# Altium PCB PCB1.PcbDoc
Units mm, origin at the board's own origin, x right, y up, seen from the top; angles counter-clockwise.
Board outline 80 x 100 mm, 2 copper layers (Top Layer, Bottom Layer); 93 components, 53 nets, 282 pads, 664 vias.
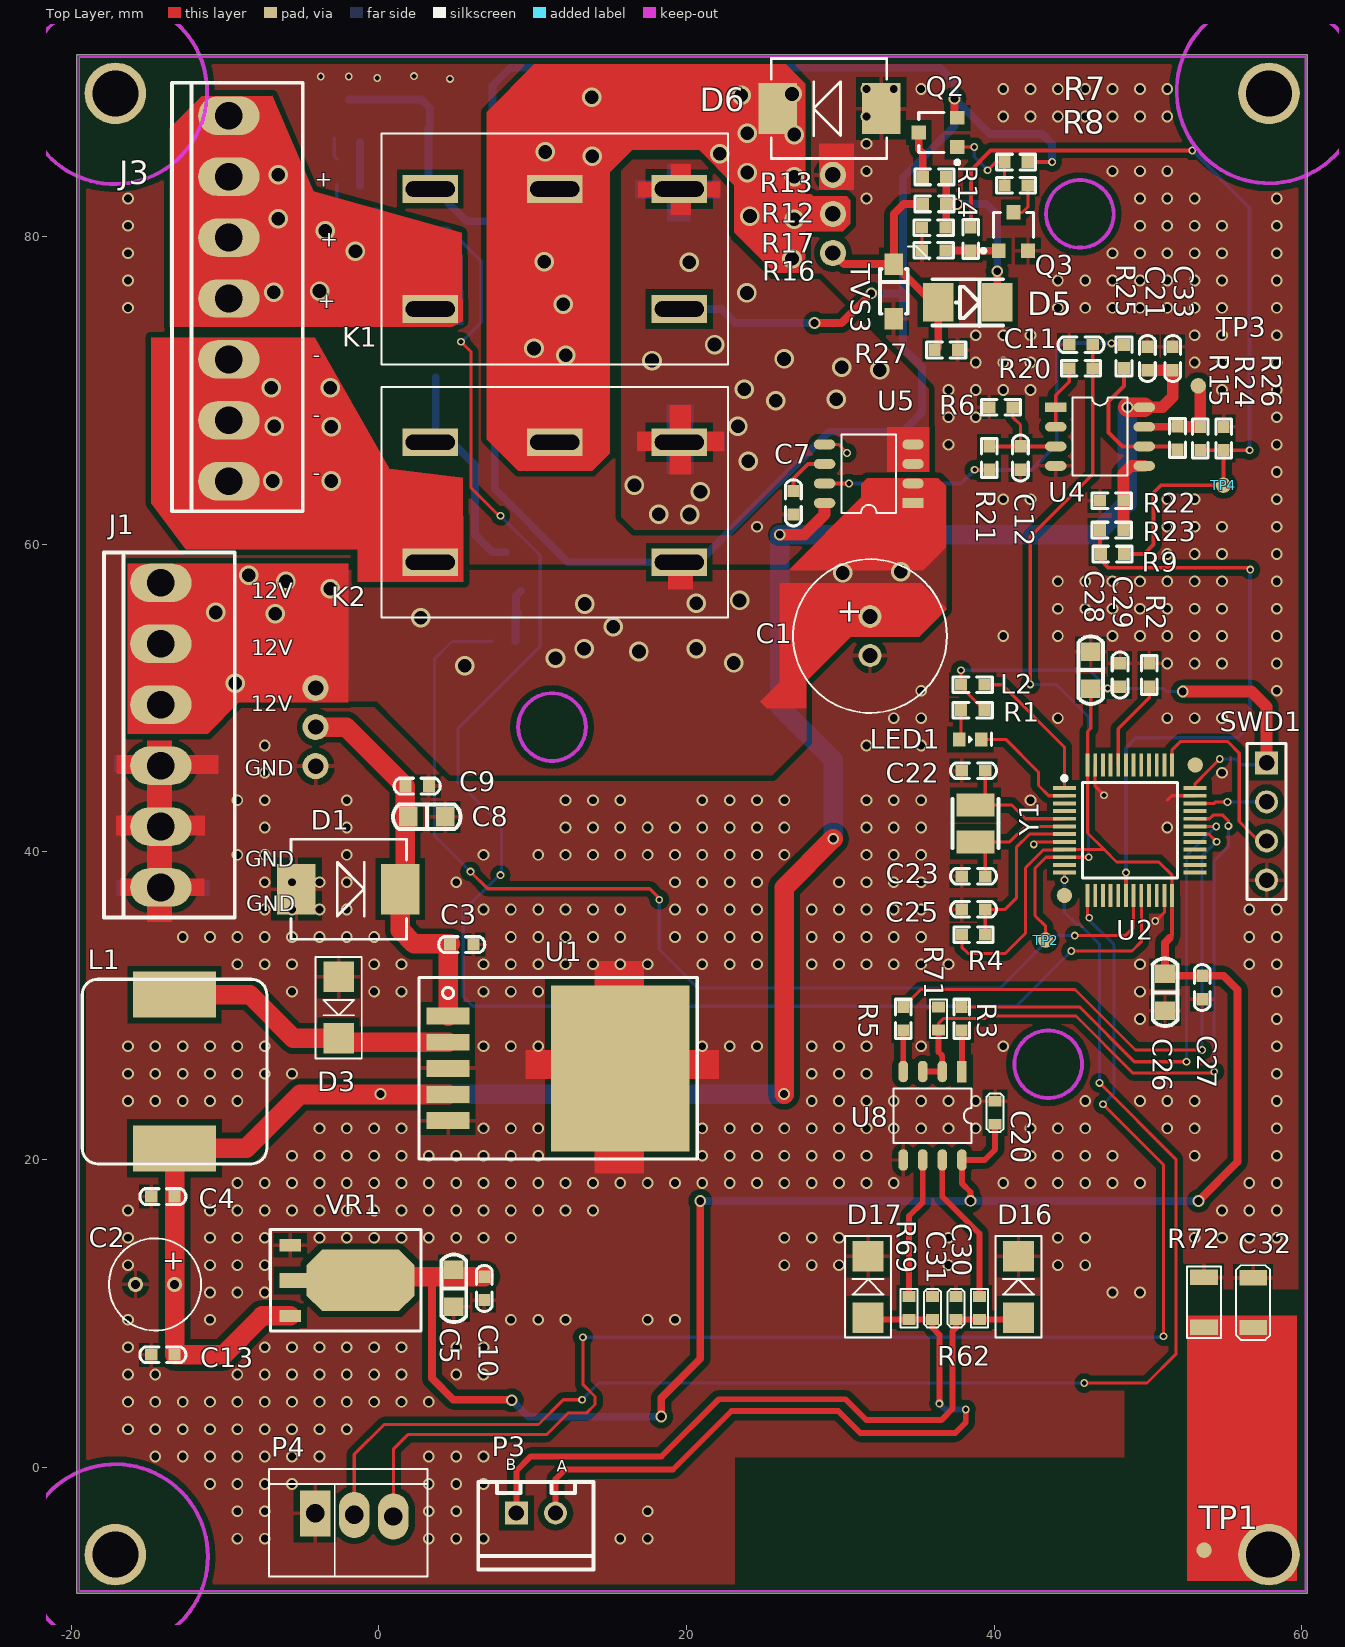
[diagram p0: Top Layer view]
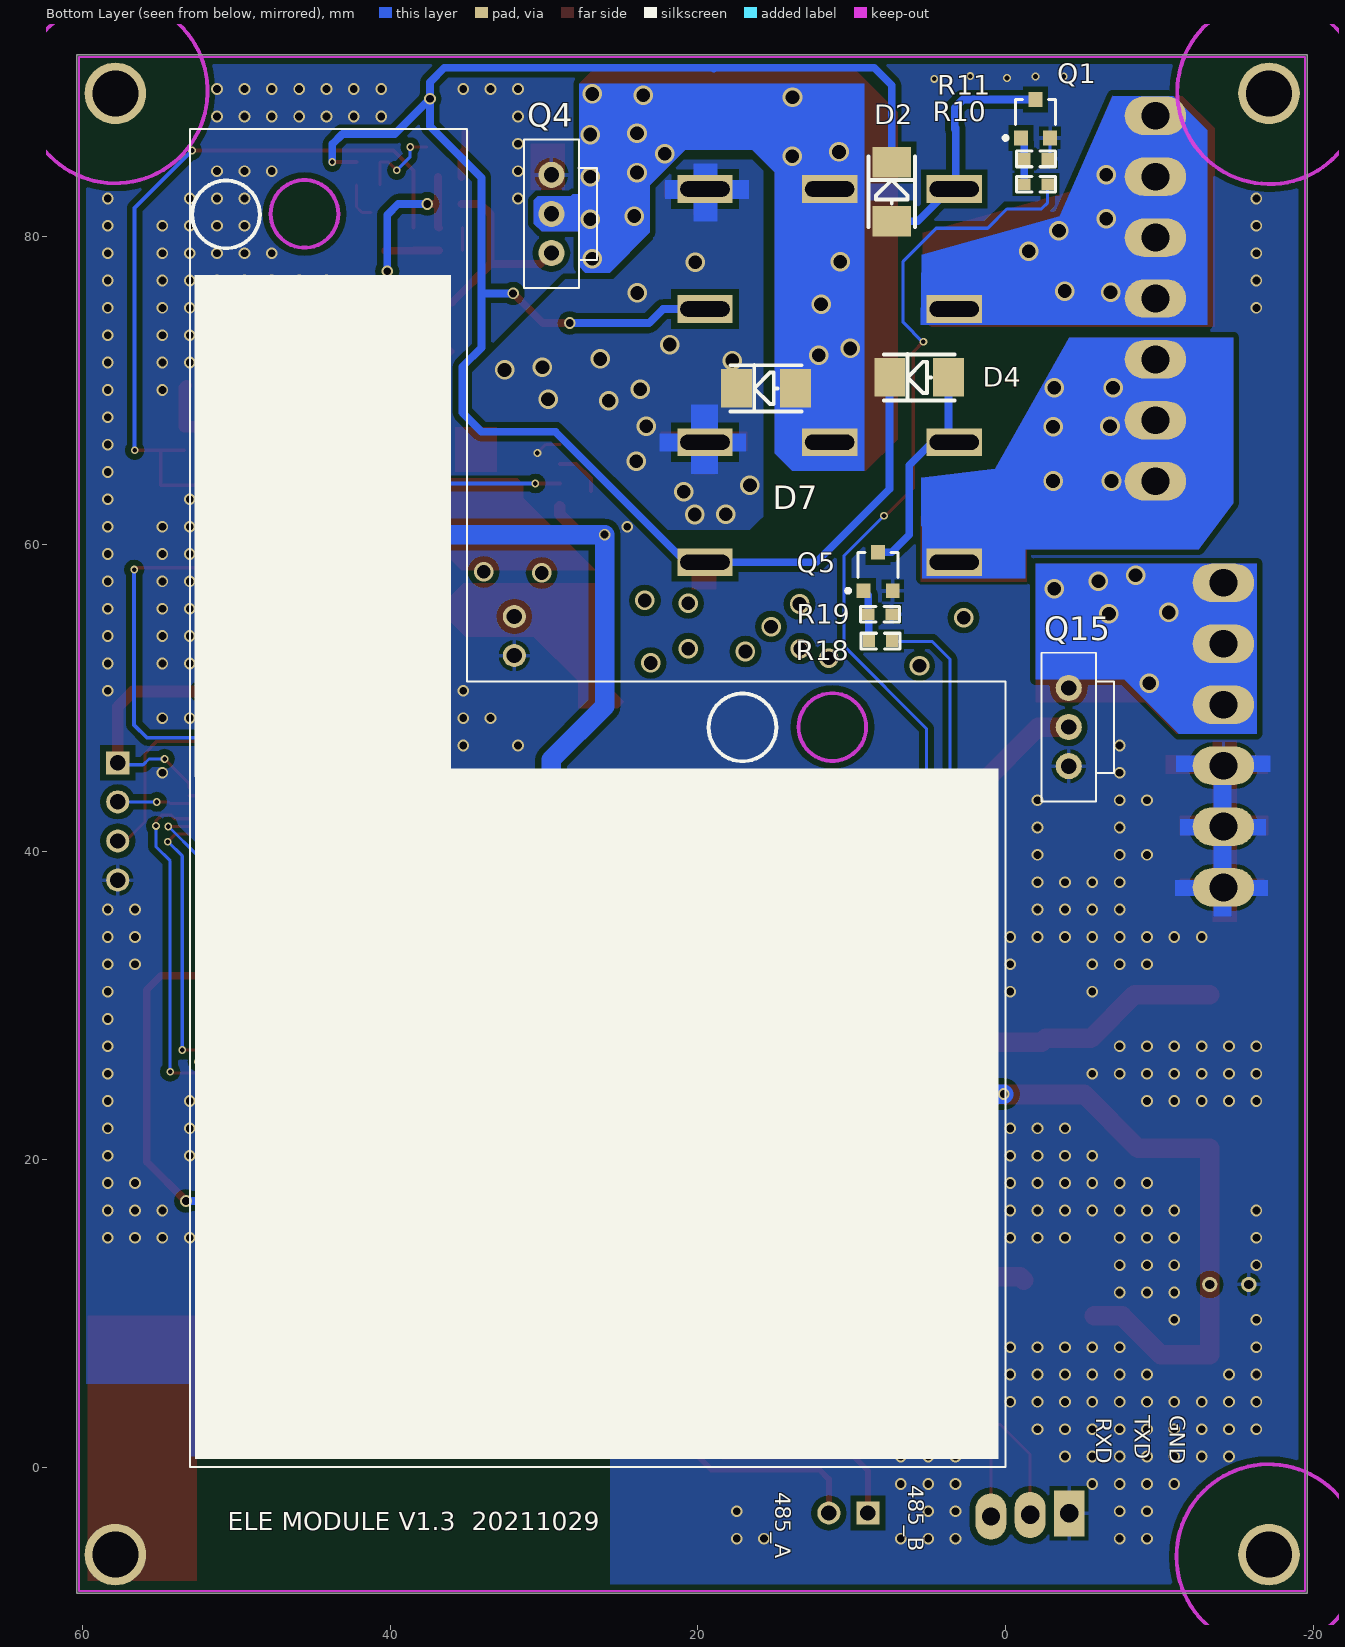
[diagram p1: Bottom Layer view, seen from below]
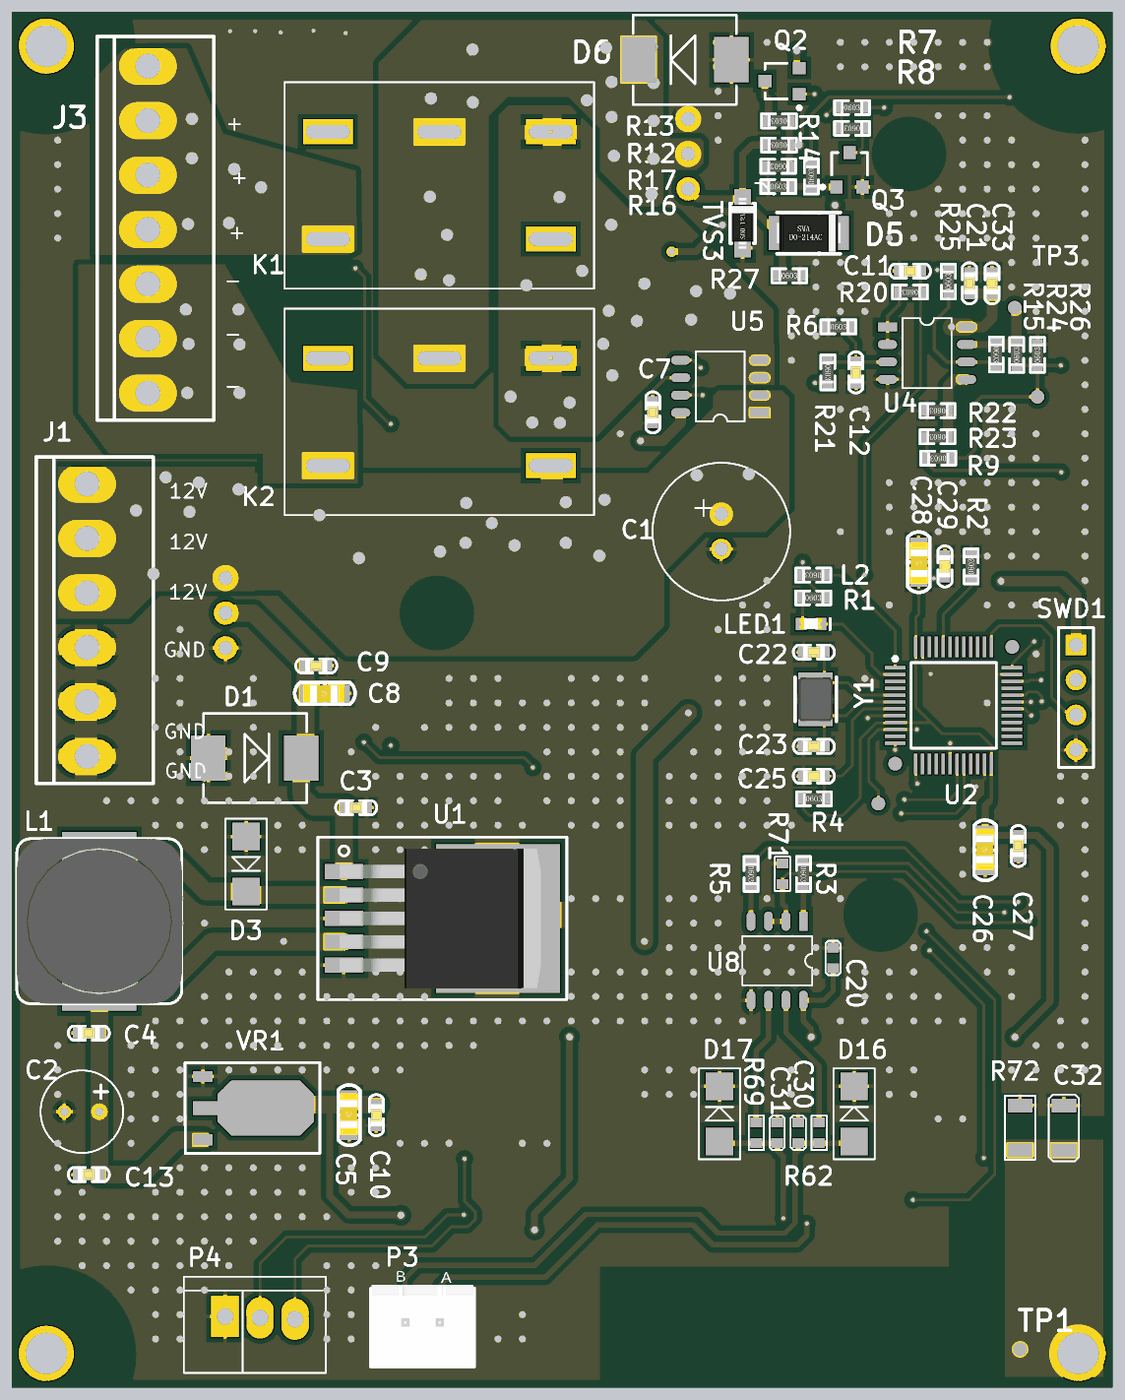
[diagram p2: 3D render of the assembled board from above, using the file's embedded part models]
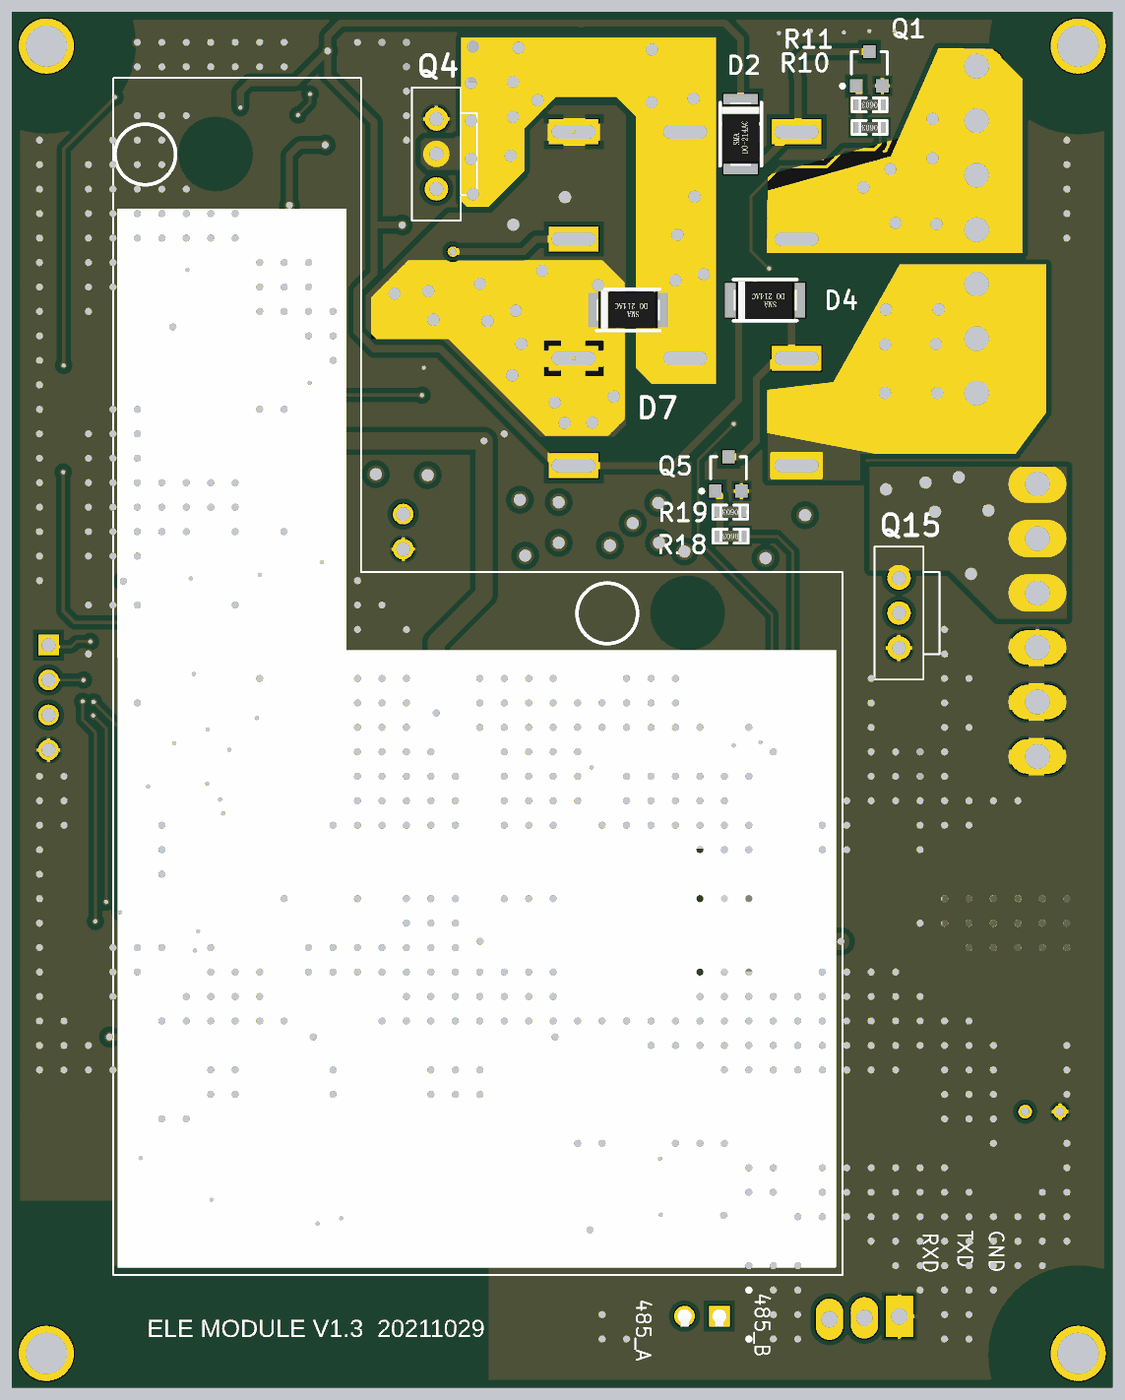
[diagram p3: 3D render of the assembled board from below, using the file's embedded part models]

## Layer stack, top to bottom
Top Layer: signal copper 0.0356
Dielectric: dielectric 0.32, FR-4, Dk 4.8
Bottom Layer: signal copper 0.0356

## Board outline
-19.634,-8.195 -19.634,91.805 60.366,91.805 60.366,-8.195

## Design rules (kind name [scope] priority, off if disabled: settings)
Clearance gnd [All] p1: gap=0.381
Clearance [All] p2: gap=0.254
DiffPairsRouting [All] p1: maxlimit=0.254 minlimit=0.254 mostfreqgap=0.254 maxuncoupledlength=12.7
MinimumSolderMaskSliver [All] p1: minsoldermaskwidth=0.025
PolygonConnect PolygonConnect_1 [isvia] p1: connectstyle=Direct reliefconductorwidth=0.254 reliefentries=4 polygonreliefangle="90 Angle"
PolygonConnect [All] p2: connectstyle=Relief reliefconductorwidth=0.254 reliefentries=4 polygonreliefangle="90 Angle"
RoutingVias [All] p1: holewidth=0.711 width=1.27 viastyle="Through Hole" minholewidth=0.711 minwidth=1.27 maxholewidth=0.711 maxwidth=1.27
SilkscreenOverComponentPads SilkToSolderMaskClearance [IsPad] p1: minsilkscreentomaskgap=0.025
SolderMaskExpansion [All] p1: expansion=0.102
Width [All] p1: maxlimit=12.7 minlimit=0.127 preferedwidth=0.254
25 further rules are at their usual default settings.

## Classes and differential pairs
component class 02_Power: C1 C2 C3 C4 C5 C8 C9 C10 C13 D1 D3 J1 L1 Q15 U1 VR1
component class 03_MCU: C22 C23 C25 C26 C27 C28 C29 L2 LED1 R1 R2 R3 R4 R5 SWD1 U2 Y1
component class 07_EL_CON: C7 C11 C12 C21 C33 C? D2 D4 D5 D6 D7 J3 K1 K2 Q1 Q2 Q3 Q4 Q5 R6 R7 R8 R9 R10 R11 R12 R13 R14 R15 R16 R17 R18 R19 R20 R21 R22 R23 R24 R25 R26 R27 R? TP2 TP3 TP4 TVS3 U4 U5 U?
component class com: C20 C30 C31 C32 D16 D17 P3 P4 R62 R69 R71 R72 TP1 U8
differential pair 485: +485_P -485_N

## Components (designator, comment, footprint, x,y, rotation, side; value= is the part's Value field where it differs from the comment)
C1 "1000uF/35V" 10*16 31.928,54.026 r90 top
C2 "100uF/35V" 6*8 -14.554,11.871 r0 top
C3 "104 50V" SMD-0603C 5.385,33.969 r180 top
C4 "104 50V" SMD-0603C -14.046,17.586 r0 top
C5 "10uF 25V" SMD-0805C 4.877,11.617 r90 top
C7 "104 50V" SMD-0603C 26.949,62.687 r270 top
C8 "10uF50V" SMD-0805C 3.115,42.269 r180 top
C9 "104 50V" SMD-0603C 2.489,44.272 r180 top
C10 "104 50V" SMD-0603C 6.85,11.617 r90 top
C11 "NC" SMD-0603C 45.644,72.958 r0 top
C12 "104 50V" SMD-0603C 41.707,65.592 r270 top
C13 "104 50V" SMD-0603C -14.046,7.299 r0 top
C20 "104 50V" 0603C 40.056,22.285 r90 top
C21 "104 50V" SMD-0603C 49.962,72.069 r270 top
C22 "12P 50V" SMD-0603C 38.659,45.272 r180 top
C23 "12P 50V" SMD-0603C 38.659,38.414 r180 top
C25 "104 50V" SMD-0603C 38.659,36.255 r0 top
C26 "10uF 25V" SMD-0805C 51.105,30.864 r90 top
C27 "104 50V" SMD-0603C 53.518,31.175 r90 top
C28 "10uF 25V" SMD-0805C 46.279,51.806 r270 top
C29 "104 50V" SMD-0603C 48.184,51.495 r270 top
C30 "220PF/16V" 0603C 37.516,9.585 r90 top
C31 "220PF/16V" 0603C 35.992,9.585 r90 top
C32 "1NF/2KV" 1206C 56.834,12.319 r270 top
C33 "104 50V" SMD-0603C 51.613,72.069 r270 top
D1 "SMCJ24CA" SMC -5.359,37.567 r0 top
D2 "1N4007" DO-214-AC 7.391,82.906 r90 bottom
D3 "SS34" SMA -2.616,31.873 r270 top
D4 "1N4007" DO-214-AC 5.613,70.841 r0 bottom
D5 "1N4007" DO-214-AC 38.278,75.717 r0 top
D6 "SMC27CA" SMC 32.664,88.316 r180 top
D7 "1N4007" DO-214-AC 15.57,70.129 r0 bottom
D16 "SMAJ6.5CA" SMA 41.58,9.712 r90 top
D17 "SMAJ6.5CA" SMA 31.801,9.712 r90 top
J1 "HEADER_6" VH-AW-3.96*6P -14.173,43.621 r90 top
J3 "Header 7" VH-AW-3.96*7P -9.754,70.028 r90 top
K1 "301-1C-C-D1-24VDC" 301-1C-C-R1-24VDC 19.533,83.083 r180 top
K2 "301-1C-C-D1-24VDC" 301-1C-C-R1-24VDC 19.533,66.624 r180 top
L1 "33uH/5a" CDRH-127 -13.284,25.714 r270 top
L2 "MPZ1608D101BTA00" SMD-0603 38.605,50.86 r180 top
LED1 "LED G" SMD-0603D 38.437,47.316 r0 top
P3 "XH2.54 2P" SIP-2A 10.211,-2.988 r0 top
P4 "1*3P" 3X2.54MMZ2 -4.14,-3.015 r0 top
Q1 "LH8050QLT1G" SOT-23 -1.956,87.655 r180 bottom
Q2 "BC807-16" SOT-23 36.347,86.766 r90 top
Q3 "BC817-16" SOT-23 41.25,80.315 r0 top
Q4 "AOT2502L/AOT2610L" to220 29.515,78.927 r90 bottom
Q5 "LH8050QLT1G" SOT-23 8.28,58.217 r180 bottom
Q15 "AOTF4185" to220 -4.115,45.568 r90 bottom
R1 "1K" SMD-0603 38.605,49.209 r0 top
R2 "100K" SMD-0603 50.089,51.495 r90 top
R3 "1K" SMD-0603 37.897,29.143 r270 top
R4 "100K" SMD-0603 38.659,34.604 r0 top
R5 "1K" SMD-0603 34.087,29.143 r270 top
R6 "10K" SMD-0603 40.437,68.904 r0 top
R7 "47K" SMD-0603 41.427,84.836 r0 top
R8 "2K" SMD-0603 41.427,83.337 r180 top
R9 "0" SMD-0603 47.696,59.356 r180 top
R10 "2K" SMD-0603 -1.981,83.388 r0 bottom
R11 "5.1K" SMD-0603 -1.981,85.039 r0 bottom
R12 "100" SMD-0603 36.119,82.118 r180 top
R13 "7.8K" SMD-0603 36.119,83.871 r180 top
R14 "1K" SMD-0603 38.481,79.832 r90 top
R15 "510K" SMD-0603 51.918,66.904 r270 top
R16 "10K" SMD-0603 36.068,79.096 r0 top
R17 "4.7K" SMD-0603 36.068,80.569 r180 top
R18 "2K" SMD-0603 8.128,53.696 r0 bottom
R19 "5.1K" SMD-0603 8.153,55.448 r0 bottom
R20 "100R" SMD-0603 45.644,71.434 r180 top
R21 "10K" SMD-0603 39.675,65.592 r270 top
R22 "510K" SMD-0603 47.638,62.818 r180 top
R23 "10K" SMD-0603 47.638,60.913 r180 top
R24 "20K/NC" SMD-0603 53.391,66.862 r90 top
R25 "10K" SMD-0603 48.438,72.196 r90 top
R26 "30K/NC" SMD-0603 54.915,66.862 r90 top
R27 "10K" SMD-0603 36.881,72.619 r0 top
R62 "8.2R 5%" 0603R 39.04,11.085 r270 top
R69 "8.2R 5%" 0603R 34.468,11.085 r270 top
R71 "10K" 0603R 36.373,28.405 r90 top
R72 "10M 5%" 1206r 53.645,12.327 r270 top
SWD1 "SIP-4 (NC)" SIP-4 57.709,41.97 r270 top
TP1 "TPS" tpd 53.645,-5.401 r90 top
TP2 "TPS" tpd 43.344,34.259 r0 top
TP3 "TPS" tpd 53.264,70.291 r0 top
TP4 "TPS" tpd 54.904,63.825 r0 top
TVS3 "BZT52C10-G" SOD-123 33.477,76.429 r90 top
U1 "LM2596S 5.0V" TO-263-5 4.496,25.919 r270 top
U2 "GD32F103C8T6" LQFP48 44.565,44.144 r0 top
U4 "OPA2376AIDR" SO-8 44.003,68.894 r0 top
U5 "ACS712ELCTR-20A-T" SO-8 34.722,62.671 r180 top
U8 "TP8485E-SR" SO-8 37.897,25.714 r270 top
VR1 "LM1117 3.3V" SOT223 -5.764,14.425 r270 top
Y1 "8MHz" XTAL-3225-2 38.786,41.843 r270 top

## Footprints (in the part's own frame and the unit in brackets; to place one, negate y for a bottom-side part, rotate by r counter-clockwise, add the part's x,y. Pads: shape width x height; smd on the part's side, far side on the other; paste and mask are expansions set on the pad)
3X2.54MMZ2 [mm]
  rect 2x3 hole 1.2: 1(0,0)
  oval 2x3 hole 1.2: 2(2.54,-0.1) 3(5.08,-0.2)
  silkscreen extent -3,-4.1 7.31,2.9
6*8 [mm]
  round 1 hole 0.6: 1(1.27,0) 2(-1.27,0)
  silkscreen extent -3,-3 3,3
10*16 [mm]
  round 1.5 hole 1: 1(1.27,0) 2(-1.27,0)
  silkscreen extent -5,-5 5,5
301-1C-C-R1-24VDC [mm]
  rect 3.6x1.8 hole 1 slot 3.2 at 0 deg: 30(16.2,7.8) 85(16.2,0) 86(0,7.8) 87(8.1,0) 88(0,0)
  silkscreen extent -3.15,-3.6 19.35,11.4
0603C [mm]
  rect 0.7x0.85 smd: 1(0,0) 2(1.5,0)
  silkscreen extent -0.5,-0.55 2,0.55
0603R [mm]
  rect 0.7x0.85 smd: 1(0,0) 2(1.5,0)
  silkscreen extent -0.5,-0.55 2,0.55
1206C [mm]
  rect 1x1.8 smd: 1(0,0) 2(3.25,0)
  silkscreen extent -0.8,-1.1 4.05,1.1
1206r [mm]
  rect 1x1.8 smd: 1(0,0) 2(3.25,0)
  silkscreen extent -0.7,-1.1 3.95,1.1
CDRH-127 [mm]
  rect 3x5.4 smd: 1(-5,0) 2(5,0)
  silkscreen extent -6,-6 6,6, body extent -6,-6 6,6, height 8.2
DO-214-AC [mm]
  rect 2x2.5 smd: 1(-1.915,0) 2(1.915,0)
  silkscreen extent -2.3,-1.52 2.3,1.5, body extent -2.3,-1.35 2.3,1.35, height 2.4
LQFP48 [mm]
  round 1 smd: 0(0,-6.985) 0(8.509,1.5)
  rect 1.5x0.25 smd: 1(0,0) 2(0,-0.5) 3(0,-1) 4(0,-1.5) 5(0,-2) 6(0,-2.5) 7(0,-3) 8(0,-3.5) 9(0,-4) 10(0,-4.5) 11(0,-5) 12(0,-5.5) 25(8.495,-5.5) 26(8.495,-5) 27(8.495,-4.5) 28(8.495,-4) 29(8.495,-3.5) 30(8.495,-3) 31(8.495,-2.5) 32(8.495,-2) 33(8.495,-1.5) 34(8.495,-1) 35(8.495,-0.5) 36(8.495,0)
  rect 0.25x1.5 smd: 13(1.5,-7) 14(2,-7) 15(2.5,-7) 16(3,-7) 17(3.5,-7) 18(4,-7) 19(4.5,-7) 20(5,-7) 21(5.5,-7) 22(6,-7) 23(6.5,-7) 24(7,-7) 37(7,1.5) 38(6.5,1.5) 39(6,1.5) 40(5.5,1.5) 41(5,1.5) 42(4.5,1.5) 43(4,1.5) 44(3.5,1.5) 45(3,1.5) 46(2.5,1.5) 47(2,1.5) 48(1.5,1.5)
  silkscreen extent -0.13,-5.86 7.35,0.76
SIP-2A [mm]
  rect 1.5x1.5 hole 1: 1(-1.27,0)
  round 1.5 hole 1: 2(1.27,0)
  silkscreen extent -3.75,-3.68 3.75,2.02, body extent -3.7,-3.81 3.7,2.29, height 7.5
SIP-4 [mm]
  rect 1.5x1.5 hole 1: 1(-3.81,0)
  round 1.5 hole 1: 2(-1.27,0) 3(1.27,0) 4(3.81,0)
  silkscreen extent -5.08,-1.27 5.08,1.27
SMA [mm]
  rect 2x2 smd: 1(0,0) 2(4,0)
  silkscreen extent -1.3,-1.5 5.3,1.5
SMC [mm]
  rect 2.5x3.3 smd: 1(0,0) 2(6.75,0)
  silkscreen extent -0.35,-3.25 7.15,3.25
SMD-0603 [mil]
  rect 31.5x30 smd: 1(-30,0) 2(30,0)
  silkscreen extent -50,-20 50,20, body extent -31,-16 31,16, height 18
SMD-0603C [mil]
  rect 31.5x30 smd: 1(-30,0) 2(30,0)
  silkscreen extent -59,-20 59,20, body extent -32,-16 32,16, height 31
SMD-0603D [mm]
  rect 0.8x0.9 smd: 1(-0.7,-0.012) 2(0.73,-0.012)
  silkscreen extent -0.08,-0.41 1.4,0.39, body extent -0.8,-0.39 0.8,0.41, height 0.6
SMD-0805C [mm]
  rect 1.2x1.27 smd: 1(-1.2,0) 2(1.2,0)
  silkscreen extent -2.2,-0.8 2.2,0.8, body extent -1.42,-0.67 1.58,0.73, height 0.93
SO-8 [mil]
  rect 55x25 smd: 1(0,0)
  oval 55x25 smd: 2(0,-50) 3(0,-100) 4(0,-150) 5(226.38,-150) 6(226.38,-100) 7(226.38,-50) 8(226.38,0)
  silkscreen extent 43,-175 183,25
SOD-123 [mm]
  rect 1.4x1.2 smd: 1(-1.778,0) 2(1.778,0)
  silkscreen extent -1.45,-0.9 1.45,0.9, body extent -1.85,-0.8 1.85,0.8, height 1.2
SOT223 [mm]
  rect 0.8x1.4 smd: 1(0,0) 3(4.6,0)
  rect 1x1.854 smd: 2(2.3,0.227)
  oct 4x7 smd: 4(2.286,4.572)
  silkscreen extent -1.02,-1.3 5.59,8.51
SOT-23 [mm] "SOT-23; 3 Leads; Body 3.0 x 2.6 mm, inc. leads (LxW max)"
  rect 0.9x0.95 smd: 1(-0.95,-1.25) 2(0.95,-1.25) 3(0,1.25)
  silkscreen extent -2.08,-1.37 1.3,1.25
to220 [mm]
  round 1.7 hole 1: 1(0,0) 2(2.54,0) 3(5.08,0)
  silkscreen extent -2.29,-2.95 7.37,1.78
TO-263-5 [mm]
  rect 1.1x2.8 smd: 1(-3.4,0) 2(-1.7,0) 3(0,0) 4(1.7,0) 5(3.4,0)
  rect 10.8x9 smd: 6(0,11.2)
  silkscreen extent -5.9,-1.9 5.9,16.2, body extent -5.08,-0.32 5.08,14.32, height 4.57
tpd [mm]
  round 1 smd: 1(0,0)
VH-AW-3.96*6P [mm]
  oval 2.5x4 hole 1.8: 1(-5.94,0) 2(-1.98,0) 3(1.98,0) 4(5.94,0) 5(9.9,0) 6(13.86,0)
  silkscreen extent -7.89,-4.8 15.82,3.7
VH-AW-3.96*7P [mm]
  oval 2.5x4 hole 1.8: 1(-5.94,0) 2(-1.98,0) 3(1.98,0) 4(5.94,0) 5(9.9,0) 6(13.86,0) 7(17.82,0)
  silkscreen extent -7.89,-4.8 19.96,3.7
XTAL-3225-2 [mm]
  rect 1.5x2.5 smd: 1(-1.2,0) 2(1.2,0)
  silkscreen extent -1.6,-1.5 1.6,1.5, body extent -1.6,-1.25 1.6,1.25, height 0.9

## Part data
C1 C2: library part CAP2, "电解电容"
C3 C4 C8 C9 C10 C11 C12 C13: library part CAP4, "贴片电容 10%"
C5 C21 C25 C26 C27 C28 C29 C33: library part CAP4, "贴片电容 20%"
C7: library part C, "贴片电容 10%"
C20 C30 C31 C32: library part CAP
C22 C23: library part CAP4, "贴片电容 5%"
D1 D3 D6: library part DIODE
D2 D4 D5 D7: library part DIODE2, "贴片二极管"
D16 D17: library part D_ESD
J3: "Header, 7-Pin"
K1 K2: library part JDQ1, "5V 继电器"
L1: library part IND
L2: library part CIZHU1, "磁珠电感 100R 100MHz"
LED1: library part LED, "绿色普亮"
P3: library part SIP-2, "XH2.54 2P 直插"
P4: library part HDR1*3
Q1 Q3 Q5: library part NPN-1, "三极管"
Q2: library part PNP, "PNP"
Q4: library part SI7860
Q15: library part "MOSFET N", "MOSFET N"
R1 R20: library part RES0, "贴片电阻 5%"
R2 R3 R4 R5 R10 R11 R18 R19: library part RES2, "贴片电阻 5%"
R6 R21: library part RES0, "贴片电阻 1%"
R7 R8 R9 R12 R13 R14 R15 R16 R17 R22 R23 R24 R25 R26 R27: library part RES-SOP, "贴片电阻 5%"
R62 R69 R71 R72: library part RES
SWD1: library part SIP-4, "ISP 下载"
TVS3: library part TVS-1, "TVS 10V"
U1: library part LM2596
U2: library part STM32F103C6
U4: library part LM358, "运算放大器"
U5: library part ACS712, "HALL 20A 电流传感器"
VR1: library part LM1117, "三端稳压器"
Y1: library part XTAL, "3225 贴片晶振"

## Free pads (board coordinates)
  round 4 hole 3: 0(-17.134,-5.695) 0(-17.134,89.305) 0(57.866,-5.695) 0(57.866,89.305)

## Via types
v1: diameter 0.762, hole 0.508, Top Layer to Bottom Layer, tented both sides, 551 vias
v2: diameter 1.27, hole 0.889, Top Layer to Bottom Layer, tented both sides, 64 vias
v3: diameter 0.508, hole 0.305, Top Layer to Bottom Layer, tented both sides, 48 vias
v4: diameter 0.762, hole 0.508, Top Layer to Bottom Layer, 1 vias

## Nets (pads, with @x,y where several pads share a name; then routed paths per layer and width w, separated by ;. In a path a pad name is that pad's centre, name@x,y a point inside that pad or via, vN(x,y) a via of type N, cw(c..) or ccw(c..) an arc to the next point about the centre after c; other vN are vias at no path point)
485_N: C30.1 D16.1 P3.1 R62.2 | length 44
  Top Layer w0.381: P3.1@8.941,-3.115 P3.1 8.941,-0.956 8.941,-0.24 9.876,0.696 18.373,0.696 22.088,4.411 30.337,4.411 31.699,3.048 36.551,3.048 37.287,3.785 37.287,8.816 37.516,9.045 C30.1 R62.2 41.453,9.585 D16.1
485_P: C31.1 D17.1 P3.2 R69.2 | length 44.4
  Top Layer w0.381: P3.2@11.481,-3.215 P3.2 11.481,-1.337 11.481,-0.787 12.105,-0.162 19.126,-0.162 22.926,3.638 29.865,3.638 31.293,2.21 37.465,2.21 38.151,2.896 v3(38.151,3.743) ; D17.1 31.928,9.585 R69.2 C31.1 35.992,9.045 36.436,8.6 v3(36.436,4.124)
  Bottom Layer w0.381: v3(36.436,4.124) 36.817,3.743 v3(38.151,3.743)
ELE_O: R21.2 R25.2 U5.7 | length 27.6
  Top Layer w0.254: U5.7 v3(30.563,63.941) ; v3(38.729,64.83) R21.2 ; v3(47.625,73.05) R25.2@48.362,73.05
  Bottom Layer w0.254: v3(30.563,63.941) 37.825,63.941 v3@38.709,64.825 ; v3(38.729,64.83) 42.428,64.83 44.069,66.472 44.069,72.746 44.399,73.076 v3@47.447,73.076
ELE_PWM: R9.2 R23.2 U2.18 | length 40.3
  Top Layer w0.254: R23.2 46.876,59.414 R9.2 46.934,58.956 47.396,58.493 47.396,58.467 56.519,58.467 v3(56.642,58.344) ; U2.18 v3(48.565,38.642)
  Bottom Layer w0.254: v3(48.565,38.642) 48.565,46.743 49.232,47.41 55.799,47.41 56.642,48.253 v3(56.642,58.344)
ELE_PWM_O: R9.1 R14.2 R24.1 R26.1 TP4.1 | length 55.4
  Top Layer w0.254: R14.2 38.481,84.303 39.773,85.594 v3(52.874,85.594) ; R9.1 49.755,59.356 50.363,59.964 50.363,63.342 50.846,63.825 TP4.1 54.915,63.836 R26.1 ; R24.1 R26.1 ; v3(56.607,66.1) R26.1
  Bottom Layer w0.254: v3(52.874,85.594) 56.607,81.86 v3(56.607,66.1)
EN1_485: R71.1 U2.32 U8.2 U8.3 | length 43.3
  Top Layer w0.203: R71.1 36.373,28.83 36.692,29.15 38.425,29.15 38.427,29.152 39.37,29.152 39.539,29.321 45.316,29.321 49.024,25.613 54.215,25.613 v3(54.301,25.7) ; U2.32 53.995,42.144 54.232,42.381 54.86,42.381 55.223,42.018 v3(55.223,41.683)
  Top Layer w0.381: U8.3 U8.2 36.627,26.73 36.373,26.984 R71.1
  Bottom Layer w0.203: v3(54.301,25.7) 54.301,39.405 55.223,40.327 v3(55.223,41.683)
GND: C1.2 C2.2 C3.1 C4.1 C5.1 C7.2 C8.1 C9.1 C10.1 C11.1 C12.2 C13.1 C20.2 C21.1 C22.2 C23.2 C25.1 C26.1 C27.1 C28.1 C29.1 C30.2 C31.2 C32.1 C33.1 D1.1 D3.1 D6.1 D16.2 D17.2 J1.1 J1.2 J1.3 P4.1 Q1.2 Q3.2 Q4.3 Q5.2 Q15.1 R2.2 R6.1 R11.1 R16.1 R17.2 R19.1 R22.2 R26.2 R27.2 R71.2 R72.1 SWD1.4 TVS3.1 U1.3 U1.5 U1.6 U2.8 U2.23 U2.35 U2.47 U4.4 U5.5 U8.5 VR1.1 | length 14.9
  Top Layer w0.203: U5.5 29.878,66.481 v3@30.484,65.876 ; R16.1 R17.2 ; v3@42.52,40.462 42.702,40.644 U2.8 44.545,40.625 42.718,40.625 v3(42.574,40.481) ; U2.47 46.565,44.257 v3(47.143,43.678) ; v3@50.47,35.455 51.065,36.05 U2.23 ; 51.252,43.354 51.542,43.644 U2.35
  Bottom Layer w0.203: Q1.2 -2.906,85.202 R11.1
  other v1: -9.2,-4.652 -7.422,-4.652 3.246,-4.652 5.024,-4.652 6.802,-4.652 15.692,-4.652 17.47,-4.652 -9.2,-2.874 -7.422,-2.874 3.246,-2.874 5.024,-2.874 17.47,-2.874 -10.978,-1.096 -9.2,-1.096 -7.422,-1.096 -5.644,-1.096 3.246,-1.096 5.024,-1.096 6.802,-1.096 -14.534,0.682 -12.756,0.682 -10.978,0.682 -9.2,0.682 -7.422,0.682 -5.644,0.682 -3.866,0.682 3.246,0.682 5.024,0.682 6.802,0.682 -16.312,2.46 -14.534,2.46 -12.756,2.46 -10.978,2.46 -9.2,2.46 -7.422,2.46 -5.644,2.46 -3.866,2.46 -2.088,2.46 -16.312,4.238 -14.534,4.238 -12.756,4.238 -10.978,4.238 -9.2,4.238 -7.422,4.238 -5.644,4.238 -3.866,4.238 -2.088,4.238 -0.31,4.238 1.468,4.238 3.246,4.238 -16.312,6.016 -14.534,6.016 -9.2,6.016 -7.422,6.016 -5.644,6.016 -3.866,6.016 -2.088,6.016 -0.31,6.016 1.468,6.016 5.024,6.016 6.802,6.016 -16.312,7.794 -7.422,7.794 -5.644,7.794 -3.866,7.794 -2.088,7.794 -0.31,7.794 1.468,7.794 5.024,7.794 6.802,7.794 -16.312,9.572 -10.978,9.572 8.58,9.572 10.358,9.572 12.136,9.572 17.47,9.572 19.248,9.572 -10.978,11.35 -9.2,11.35 -7.422,11.35 47.696,11.35 49.474,11.35 -16.312,13.128 -10.978,13.128 -9.2,13.128 -7.422,13.128 26.36,13.128 28.138,13.128 29.916,13.128 37.028,13.128 44.14,13.128 45.918,13.128 -16.312,14.906 -10.978,14.906 -9.2,14.906 -7.422,14.906 -3.866,14.906 -2.088,14.906 -0.31,14.906 1.468,14.906 3.246,14.906 5.024,14.906 6.802,14.906 8.58,14.906 26.36,14.906 28.138,14.906 29.916,14.906 37.028,14.906 44.14,14.906 45.918,14.906 53.03,14.906 54.808,14.906 56.586,14.906 58.364,14.906 -16.312,16.684 -10.978,16.684 -9.2,16.684 -7.422,16.684 -5.644,16.684 -3.866,16.684 -2.088,16.684 -0.31,16.684 1.468,16.684 3.246,16.684 5.024,16.684 6.802,16.684 8.58,16.684 10.358,16.684 12.136,16.684 13.914,16.684 54.808,16.684 56.586,16.684 58.364,16.684 -9.2,18.462 -7.422,18.462 -5.644,18.462 -3.866,18.462 -2.088,18.462 -0.31,18.462 1.468,18.462 3.246,18.462 5.024,18.462 6.802,18.462 8.58,18.462 10.358,18.462 12.136,18.462 13.914,18.462 15.692,18.462 17.47,18.462 19.248,18.462 21.026,18.462 22.804,18.462 24.582,18.462 26.36,18.462 28.138,18.462 29.916,18.462 31.694,18.462 33.472,18.462 40.584,18.462 42.362,18.462 44.14,18.462 45.918,18.462 47.696,18.462 49.474,18.462 56.586,18.462 58.364,18.462 -5.644,20.24 -3.866,20.24 -2.088,20.24 -0.31,20.24 1.468,20.24 3.246,20.24 5.024,20.24 6.802,20.24 8.58,20.24 10.358,20.24 21.026,20.24 22.804,20.24 24.582,20.24 26.36,20.24 28.138,20.24 29.916,20.24 31.694,20.24 42.362,20.24 44.14,20.24 45.918,20.24 47.696,20.24 53.03,20.24 58.364,20.24 -3.866,22.018 -2.088,22.018 -0.31,22.018 1.468,22.018 6.802,22.018 8.58,22.018 10.358,22.018 21.026,22.018 22.804,22.018 24.582,22.018 26.36,22.018 28.138,22.018 29.916,22.018 31.694,22.018 33.472,22.018 35.25,22.018 37.028,22.018 38.806,22.018 42.362,22.018 44.14,22.018 45.918,22.018 51.252,22.018 53.03,22.018 58.364,22.018 -16.312,23.796 -14.534,23.796 -12.756,23.796 -10.978,23.796 -9.2,23.796 28.138,23.796 29.916,23.796 31.694,23.796 33.472,23.796 35.25,23.796 37.028,23.796 38.806,23.796 45.918,23.796 49.474,23.796 51.252,23.796 53.03,23.796 58.364,23.796 -16.312,25.574 -14.534,25.574 -12.756,25.574 -10.978,25.574 -9.2,25.574 -7.422,25.574 -5.644,25.574 28.138,25.574 29.916,25.574 31.694,25.574 58.364,25.574 -16.312,27.352 -14.534,27.352 -12.756,27.352 -10.978,27.352 -9.2,27.352 -7.422,27.352 6.802,27.352 8.58,27.352 10.358,27.352 21.026,27.352 22.804,27.352 24.582,27.352 28.138,27.352 29.916,27.352 31.694,27.352 35.25,27.352 40.584,27.352 58.364,27.352 49.474,29.13 58.364,29.13 -5.644,30.908 -0.31,30.908 1.468,30.908 6.802,30.908 8.58,30.908 10.358,30.908 49.474,30.908 58.364,30.908 -9.2,32.686 -7.422,32.686 -5.644,32.686 -0.31,32.686 1.468,32.686 6.802,32.686 8.58,32.686 10.358,32.686 12.136,32.686 13.914,32.686 15.692,32.686 17.47,32.686 21.026,32.686 22.804,32.686 24.582,32.686 28.138,32.686 29.916,32.686 31.694,32.686 33.472,32.686 35.25,32.686 37.028,32.686 49.474,32.686 56.586,32.686 58.364,32.686 -12.756,34.464 -10.978,34.464 -9.2,34.464 -7.422,34.464 -5.644,34.464 -3.866,34.464 -2.088,34.464 -0.31,34.464 8.58,34.464 10.358,34.464 12.136,34.464 13.914,34.464 15.692,34.464 19.248,34.464 21.026,34.464 22.804,34.464 24.582,34.464 28.138,34.464 29.916,34.464 31.694,34.464 33.472,34.464 35.25,34.464 56.586,34.464 58.364,34.464 -7.422,36.242 -5.644,36.242 -3.866,36.242 -2.088,36.242 6.802,36.242 8.58,36.242 10.358,36.242 12.136,36.242 13.914,36.242 15.692,36.242 19.248,36.242 21.026,36.242 22.804,36.242 24.582,36.242 28.138,36.242 29.916,36.242 31.694,36.242 33.472,36.242 35.25,36.242 56.586,36.242 58.364,36.242 -7.422,38.02 -5.644,38.02 -3.866,38.02 -2.088,38.02 5.024,38.02 19.248,38.02 21.026,38.02 22.804,38.02 24.582,38.02 29.916,38.02 31.694,38.02 33.472,38.02 35.25,38.02 -9.2,39.798 -7.422,39.798 -2.088,39.798 6.802,39.798 10.358,39.798 12.136,39.798 13.914,39.798 15.692,39.798 17.47,39.798 19.248,39.798 21.026,39.798 22.804,39.798 24.582,39.798 26.36,39.798 31.694,39.798 33.472,39.798 35.25,39.798 -7.422,41.576 -2.088,41.576 12.136,41.576 13.914,41.576 15.692,41.576 17.47,41.576 19.248,41.576 21.026,41.576 22.804,41.576 24.582,41.576 26.36,41.576 31.694,41.576 33.472,41.576 35.25,41.576 51.252,41.576 -9.2,43.354 -7.422,43.354 -2.088,43.354 12.136,43.354 13.914,43.354 15.692,43.354 21.026,43.354 22.804,43.354 24.582,43.354 26.36,43.354 31.694,43.354 33.472,43.354 35.25,43.354 42.362,43.354 -7.422,45.132 54.808,45.132 -7.422,46.91 31.694,46.91 35.25,46.91 33.472,48.688 35.25,48.688 44.14,48.688 51.252,48.688 53.03,48.688 54.808,48.688 35.25,50.466 58.364,50.466 51.252,52.244 53.03,52.244 54.808,52.244 58.364,52.244 40.584,54.022 44.14,54.022 47.696,54.022 49.474,54.022 51.252,54.022 53.03,54.022 54.808,54.022 58.364,54.022 44.14,55.8 45.918,55.8 47.696,55.8 49.474,55.8 51.252,55.8 53.03,55.8 54.808,55.8 58.364,55.8 44.14,57.578 45.918,57.578 47.696,57.578 49.474,57.578 51.252,57.578 53.03,57.578 54.808,57.578 58.364,57.578 51.252,59.356 53.03,59.356 54.808,59.356 58.364,59.356 24.582,61.134 51.252,61.134 53.03,61.134 54.808,61.134 58.364,61.134 40.584,62.912 42.362,62.912 51.252,62.912 53.03,62.912 58.364,62.912 58.364,64.69 37.028,66.468 58.364,66.468 37.028,68.246 38.806,68.246 58.364,68.246 37.028,70.024 38.806,70.024 40.584,70.024 42.362,70.024 54.808,70.024 58.364,70.024 38.806,71.802 40.584,71.802 42.362,71.802 53.03,71.802 54.808,71.802 58.364,71.802 38.806,73.58 40.584,73.58 42.362,73.58 53.03,73.58 54.808,73.58 58.364,73.58 -16.312,75.358 44.14,75.358 45.918,75.358 47.696,75.358 49.474,75.358 51.252,75.358 53.03,75.358 54.808,75.358 58.364,75.358 -16.312,77.136 44.14,77.136 45.918,77.136 47.696,77.136 49.474,77.136 51.252,77.136 53.03,77.136 54.808,77.136 58.364,77.136 -16.312,78.914 47.696,78.914 49.474,78.914 51.252,78.914 53.03,78.914 54.808,78.914 58.364,78.914 -16.312,80.692 49.474,80.692 51.252,80.692 53.03,80.692 54.808,80.692 58.364,80.692 -16.312,82.47 31.694,82.47 49.474,82.47 51.252,82.47 53.03,82.47 58.364,82.47 31.694,84.248 47.696,84.248 49.474,84.248 51.252,84.248 31.694,86.026 31.694,87.804 40.584,87.804 42.362,87.804 44.14,87.804 45.918,87.804 47.696,87.804 49.474,87.804 51.252,87.804 31.694,89.582 33.472,89.582 35.25,89.582 40.584,89.582 42.362,89.582 44.14,89.582 45.918,89.582 47.696,89.582 49.474,89.582 51.252,89.582
  other v3: 50.47,35.503 30.43,65.929 4.623,90.246 -0.102,90.297 -3.785,90.399 -1.956,90.399 2.286,90.424
LED1: LED1.2 U2.2 | length 7.4
  Top Layer w0.203: LED1.2 40.747,47.304 42.885,45.167 42.885,44.304 43.544,43.644 U2.2
NetC7_1: C7.1 U5.6 | length 3.2
  Top Layer w0.254: C7.1 26.949,64.258 27.902,65.211 U5.6
NetC11_2: C11.2 R20.1 TP2.1 U2.10 | length 46.3
  Top Layer w0.203: v3(42.346,50.883) 42.346,60.485 46.406,64.545 R20.1 ; TP2.1 43.344,35.155 42.651,35.848 42.651,38.928 43.367,39.644 U2.10 v3(46.142,39.644)
  Top Layer w0.254: R20.1 C11.2
  Bottom Layer w0.203: v3(42.346,50.883) 44.017,50.883 46.142,48.758 v3(46.142,39.644)
NetC12_1: C12.1 R6.2 R21.1 U4.3 | length 7.1
  Top Layer w0.203: R6.2 41.199,68.259 41.707,67.751 C12.1
  Top Layer w0.254: R21.1 C12.1 U4.3
NetC22_1: C22.1 U2.5 Y1.1 | length 8.6
  Top Layer w0.203: C22.1 39.421,43.678 Y1.1 41.132,43.043 42.031,42.144 U2.5
NetC23_1: C23.1 U2.6 Y1.2 | length 8.7
  Top Layer w0.203: C23.1 39.421,40.008 Y1.2 41.003,40.643 42.004,41.644 U2.6
NetC32_2: C32.2 pad.0@57.866,-5.695 R72.2 TP1.1
NetD2_1: D2.1 K1.85 Q1.3 | length 15.6
  Bottom Layer w0.508: Q1.3 2.763,88.905 3.302,88.367 3.302,86.995 ; 3.231,87.071 3.231,83.459 5.7,80.991 D2.1
NetD3_2: D3.2 L1.1 U1.2 | length 19.1
  Top Layer w1.27: L1.1 -8.396,30.714 -5.555,27.873 D3.2 -2.362,27.619 U1.2
NetD4_1: D4.1 K2.85 Q5.3 | length 14.4
  Bottom Layer w0.508: K2.85 4.75,66.624 6.248,65.126 6.248,60.604 7.386,59.467 Q5.3 ; K2.85@3.698,66.99 D4.1
NetD5_1: D5.1 Q4.1 R12.2 R27.1 TVS3.2 | length 17
  Top Layer w0.508: Q4.1 30.236,78.207 TVS3.2 ; R12.2 34.138,82.118 33.477,81.458 TVS3.2 ; R27.1@36.068,72.517 36.093,72.517 36.363,72.786 D5.1 ; D5.1@36.424,75.778 D5.1 ; TVS3.2 35.966,75.717 D5.1
NetD5_2: D5.2 R12.1 R13.1 R17.1 | length 13.4
  Top Layer w0.508: R17.1 36.881,80.62 R12.1 ; R13.1 R12.1 ; v1(37.592,82.118) R12.1 ; D5.2@39.649,76.261 D5.2 v1(40.193,77.739)
  Bottom Layer w0.508: v1(37.592,82.118) 39.472,82.118 40.193,81.397 v1(40.193,77.739)
NetD6_2: D6.2 D7.1 K1.87 K2.87 Q4.2
  other v2: 12.141,72.288 10.084,72.72 11.989,75.59 10.744,78.359 26.856,78.546 27.002,81.112 24.123,81.33 27.002,83.88 23.953,84.157 13.868,85.217 22.149,85.369 10.82,85.496 27.002,86.628 23.953,86.701 13.843,89.052 23.546,89.187 26.856,89.265
NetJ3_1: J3.1 J3.2 J3.3 K2.30
  other v2: -6.893,64.104 -3.095,64.104 -3.095,67.624 -6.797,67.661 -6.997,70.164 -3.168,70.164
NetJ3_4: J3.4 J3.5 J3.6 J3.7 K1.30
  other v2: -6.833,76.378 -3.861,76.454 -1.524,79.045 -3.48,80.366 -6.553,81.153 -6.553,84.023
NetL2_1: L2.1 U2.1 | length 9.5
  Top Layer w0.203: L2.1 40.519,50.86 44.565,46.815 U2.1
NetLED1_1: LED1.1 R1.1 | length 1.9
  Top Layer w0.203: LED1.1 37.843,47.411 R1.1
NetQ1_1: Q1.1 R10.2 R11.2 | length 2.9
  Bottom Layer w0.508: R10.2@-1.219,83.261 R10.2 R11.2 Q1.1@-1.219,86.131
NetQ2_1: Q2.1 R7.1 R8.2 | length 5.8
  Top Layer w0.203: Q2.1 v3(38.699,85.816) ; v3(39.573,84.303) 40.107,84.836 R7.1 R8.2
  Bottom Layer w0.203: v3(38.699,85.816) 38.699,85.176 v3(39.573,84.303)
NetQ2_3: Q2.3 R13.2 | length 3
  Top Layer w0.508: Q2.3 35.097,85.68 35.357,85.42 R13.2
NetQ3_1: Q3.1 R14.1 R16.2 | length 3.5
  Top Layer w0.508: R16.2 38.456,79.096 R14.1 40.294,79.07 Q3.1
NetQ3_3: Q3.3 R8.1 | length 2.5
  Top Layer w0.203: Q3.3 41.839,81.565 42.189,81.915 R8.1
NetQ5_1: Q5.1 R18.2 R19.2 | length 3.7
  Bottom Layer w0.203: R19.2@8.941,55.347 R19.2@9.078,55.484
  Bottom Layer w0.508: R18.2 8.89,55.347 R19.2@9.042,55.499 ; R19.2 8.915,56.652 Q5.1
NetR2_1: R2.1 U2.44 | length 5.9
  Top Layer w0.203: U2.44 48.065,47.99 50.089,50.014 R2.1
NetR3_1: R3.1 U2.31 | length 33.5
  Top Layer w0.203: R3.1 45.558,29.905 49.114,26.349 v3(52.502,26.349) ; U2.31 v3(54.431,41.644)
  Bottom Layer w0.203: v3(52.502,26.349) 52.502,39.736 v3@54.412,41.647
NetR5_1: R5.1 U2.30 | length 37
  Top Layer w0.203: R5.1 35.23,31.048 45.253,31.048 49.19,27.111 v3(53.518,27.111) ; U2.30 53.961,41.144 v3(54.46,40.646)
  Bottom Layer w0.203: v3(53.518,27.111) 53.518,39.732 v3@54.412,40.626
NetR10_1: R10.1 U2.20 | length 117.1
  Top Layer w0.203: v3(5.334,73.152) 5.996,72.49 5.996,63.651 v3@7.95,61.697 ; v3(45.013,33.547) 48.96,33.547 49.565,34.152 U2.20
  Bottom Layer w0.203: R10.1 -2.743,82.197 -2.337,81.791 -0.093,81.791 1.161,80.536 4.503,80.536 6.655,78.384 6.655,75.641 ; v3@5.334,73.101 6.655,74.422 6.655,75.641 ; 6.502,29.957 41.422,29.957 v3(45.013,33.547) ; 6.502,29.972 6.096,29.972 5.486,30.582 5.486,36.148 7.819,38.481 v3(7.899,38.481) ; 6.655,74.879 6.655,75.641 ; v3(7.899,61.849) 10.49,59.258 10.49,53.365 5.131,48.006 5.131,44.552 7.976,41.707 v3@7.976,38.506
NetR15_1: R15.1 R24.2 TP3.1 U4.7 | length 6.4
  Top Layer w0.5: U4.7 R15.1@52.248,67.624
  Top Layer w0.762: R15.1@52.248,67.624 R24.2 53.391,70.164 TP3.1
NetR15_2: R15.2 R25.1 U4.6 | length 9.6
  Top Layer w0.254: R25.1 48.438,70.278 47.422,69.262 47.422,67.263 48.331,66.354 U4.6 51.705,66.354 R15.2
NetR18_1: R18.1 U2.19 | length 71.6
  Top Layer w0.203: v3(5.951,38.71) 7.069,37.592 17.602,37.592 v3@18.313,36.881 ; v3(45.24,34.548) 48.524,34.548 49.065,35.089 U2.19
  Bottom Layer w0.203: 5.994,53.67 5.41,53.67 ; v3@6.019,38.642 v3(5.951,38.71) 3.607,41.054 3.607,52.527 4.75,53.67 5.41,53.67 ; R18.1 7.341,53.67 5.41,53.67 ; v3(18.227,36.885) 18.227,33.68 18.212,33.664 20.728,31.148 40.385,31.148 43.785,34.548 v3(45.24,34.548)
NetR20_2: R20.2 U4.1 U4.2 | length 4.2
  Top Layer w0.254: U4.2 U4.1 44.003,69.679 44.882,70.558 R20.2
NetR22_1: R22.1 R23.1 U4.5 | length 5.2
  Top Layer w0.762: R23.1 R22.1 48.4,64.591 48.893,65.084 U4.5
NetR62_1: R62.1 U8.7 | length 9.9
  Top Layer w0.381: U8.7 36.627,17.586 39.04,15.173 R62.1
NetR69_1: R69.1 U8.6 | length 9.2
  Top Layer w0.381: R69.1 34.468,16.316 35.357,17.205 U8.6
RST: C25.2 R4.2 U2.7 | length 10.8
  Top Layer w0.203: R4.2 C25.2 40.713,36.255 41.442,36.985 41.442,40.288 42.298,41.144 U2.7
RXD1_485: R3.2 U8.1 | length 2.7
  Top Layer w0.381: U8.1 R3.2
RXD_233: P4.3 U2.13 | length 92.7
  Top Layer w0.203: P4.3 0.94,1.163 1.886,2.109 10.897,2.109 12.294,3.505 13.487,3.505 14.046,4.064 14.046,4.586 13.259,5.374 v3(13.259,8.442) ; U2.13 46.065,35.617 46.16,35.712 v3(46.177,35.712) ; v3(47.07,23.583) 51.01,19.643 v3(51.01,8.504)
  Bottom Layer w0.203: v3(13.259,8.442) 50.949,8.442 v3(51.01,8.504) ; v3@46.057,35.69 47.8,33.947 47.8,24.312 v3(47.07,23.583)
SWCLK: SWD1.3 U2.37 | length 12.6
  Top Layer w0.203: U2.37 51.565,46.621 52.121,47.177 55.169,47.177 55.931,46.415 55.931,41.97 57.201,40.7 SWD1.3
SWDIO: SWD1.2 U2.34 | length 4.7
  Top Layer w0.203: U2.34 54.311,43.144 54.407,43.24 v3(55.169,43.24)
  Bottom Layer w0.203: v3(55.169,43.24) SWD1.2
TXD1_485: R5.2 U8.4 | length 2.7
  Top Layer w0.381: U8.4 R5.2
TXD_232: P4.2 U2.12 | length 94.4
  Top Layer w0.203: P4.2 -1.6,0.822 0.341,2.764 10.374,2.764 11.989,4.378 v3(13.212,4.378) ; v3(44.565,38.169) U2.12 ; v3(45.851,5.46) 49.932,5.46 51.808,7.336 51.808,20.012 v3(46.842,24.978)
  Bottom Layer w0.203: v3(13.212,4.378) 14.294,5.46 v3(45.851,5.46) ; v3@44.557,38.144 44.557,36.083 45.355,35.285 45.545,35.285 46.842,33.988 v3(46.842,24.978)
VCC: C5.2 C10.2 C20.1 C26.2 C27.2 C28.2 C29.2 L2.2 R1.2 R4.1 SWD1.1 U2.9 U2.24 U2.36 U2.48 U8.8 VR1.2 VR1.4 | length 178.8
  Top Layer w0.203: v3(37.843,51.797) L2.2 37.843,50.733 R1.2 R1.2@39.307,49.209 ; R4.1 37.897,33.794 38.294,33.397 40.735,33.397 42.033,34.695 42.033,38.957 43.201,40.125 44.545,40.125 U2.9 47.143,40.144 ; C29.2 48.057,50.606 C28.2 46.279,48.034 46.065,47.82 U2.48 46.065,41.223 47.143,40.144 ; U2.24 51.565,38.468 50.695,39.338 47.95,39.338 47.143,40.144 ; U2.36 53.06,44.42 53.929,45.29 53.929,45.303 v3(54.661,46.034)
  Top Layer w0.254: 51.401,34.388 51.565,34.551 U2.24
  Top Layer w0.381: v1(38.465,17.305) 38.465,17.882 37.897,18.45 U8.8 39.386,19.964 40.056,20.634 C20.1
  Top Layer w0.508: 3.454,12.379 3.454,5.768 4.844,4.378 v1@8.636,4.378 ; v1(18.35,3.281) 18.35,4.49 20.895,7.036 v1(20.895,17.297) ; 51.401,34.388 51.105,34.091 C26.2 51.232,31.937 C27.2 54.911,31.937 55.82,31.028 55.82,19.84 v1(53.277,17.297)
  Top Layer w0.762: v1(52.261,50.422) 56.715,50.422 57.709,49.428 SWD1.1
  Top Layer w1.27: VR1.4 -0.953,12.379 3.454,12.379 C10.2
  Bottom Layer w0.203: v3(37.843,51.797) 46.199,51.797 v3(47.374,50.622) 50.967,50.622 51.167,50.422 v1(52.261,50.422) ; v3(54.661,46.034) 55.677,46.034 56.058,45.653 57.582,45.653 SWD1.1
  Bottom Layer w0.508: v1(8.636,4.341) 9.708,3.269 v1@18.35,3.269 ; v1(20.895,17.297) v1(53.277,17.297)
VDD5V: C2.1 C4.2 C13.2 C21.2 C33.2 L1.2 U1.4 U4.8 U5.8 VR1.3 | length 146.8
  Top Layer w0.762: v1(26.057,60.616) 27.637,60.616 28.972,61.951 U5.8@28.972,62.432 ; U4.8 50.937,68.894 51.613,69.571 C33.2 C21.2
  Top Layer w1.27: VR1.3 -7.585,9.825 -10.111,7.299 C13.2 C2.1 C4.2 L1.2 -8.632,20.714 -5.127,24.219 U1.4 ; v1(26.338,24.246) 26.338,37.658 v1(29.531,40.852) ; v1(48.671,68.894) U4.8
  Bottom Layer w1.27: v1(0.108,24.246) v1(26.338,24.246) ; v1(29.531,40.852) 29.531,45.982 26.057,49.457 v1(26.057,60.616) 46.594,60.616 48.651,62.673 v1@48.651,68.865
VDD12V: C3.2 C8.2 C9.2 D1.2 Q15.2 U1.1 | length 23.9
  Top Layer w1.27: Q15.2 -2.134,48.108 1.702,44.272 D1.2@1.702,38.71 ; D1.2 1.391,34.906 2.286,34.011 C3.2@4.496,34.011 ; U1.1 C3.2@4.496,34.011 ; C3.2@4.623,34.011 C3.2@4.496,34.011
VDD12V1: C1.1 D2.2 D4.2 J1.4 J1.5 J1.6 K1.86 K2.86 Q2.2 Q15.3 R7.2 U5.1 U5.2 | length 127.9
  Top Layer w0.254: R7.2 v3(43.764,84.836)
  Top Layer w0.508: v4(28.321,74.371) 30.074,74.371 v1(32.004,76.302) ; Q2.2@37.414,87.838 v1(37.414,88.956)
  Bottom Layer w0.508: D2.2 7.391,89.822 8.534,90.965 19.025,90.965 ; D4.2 7.528,63.592 12.296,58.824 K2.86 20.775,58.824 29.261,67.31 34.061,67.31 35.306,68.555 35.306,71.526 34.061,72.771 34.061,76.352 ; 18.969,90.909 19.025,90.965 ; K1.86 22.253,75.283 23.165,74.371 v4(28.321,74.371) ; v1(32.004,76.302) 34.011,76.302 34.061,76.352 ; 37.414,87.838 37.414,88.163 ; v3(43.764,84.836) 43.764,86.004 43.104,86.665 39.706,86.665 v1(37.414,88.956) ; 19.025,90.965 36.479,90.965 37.414,90.03 v1(37.414,88.956) ; 34.061,76.352 34.061,83.82 37.414,87.173 37.414,88.163 ; 37.414,88.163 v1(37.414,88.956)
  other v2: -9.347,50.952 5.588,52.095 23.063,52.273 11.481,52.578 16.903,53.019 13.337,53.207 20.625,53.207 15.24,54.635 2.718,55.22 -6.729,55.463 -10.617,55.559 13.386,56.107 20.625,56.161 23.444,56.337 -3.168,57.093 -6.045,57.591 -8.458,57.972 30.147,58.128 33.921,58.201
VO+: D7.2 K1.88 K2.88 U5.3 U5.4
  other v2: 20.193,61.925 18.186,61.951 20.904,63.398 16.612,63.83 24.003,65.38 23.343,67.666 25.792,69.33 29.735,69.427 23.749,70.079 32.563,71.323 30.099,71.501 17.755,71.933 26.34,72.04 21.819,72.974 23.927,76.327 20.168,78.334
pads on no net: U2.0 U2.3 U2.4 U2.11 U2.14 U2.15 U2.16 U2.17 U2.21 U2.22 U2.25 U2.26 U2.27 U2.28 U2.29 U2.33 U2.38 U2.39 U2.40 U2.41 U2.42 U2.43 U2.45 U2.46

## Polygon pours and split planes (outlines as drawn)
VO+ on Top Layer "Mechanical 1-No Net" (solid, remove dead copper, pour order 1000): 16.459,84.988 21.234,84.988 22.301,83.922 22.885,83.337 22.885,80.67 22.885,79.832 23.419,79.299 25.502,77.216 27.534,77.216 28.626,77.216 32.258,73.584 35.738,70.104 35.738,68.834 35.738,64.745 35.789,64.694 35.611,64.516 31.572,64.516 26.473,64.516 26.187,64.23 22.892,60.935 16.942,60.935 16.608,60.935 16.024,61.519 15.748,61.794 15.748,62.84 15.748,84.277 16.459,84.988
VDD12V1 on Top Layer "Mechanical 1-No Net" (solid, pour order 6): 36.373,64.287 31.75,64.287 31.344,63.881 31.369,63.856 31.369,63.017 31.369,62.967 27.483,59.08 26.695,58.293 15.367,58.293 -2.362,58.293 -2.794,57.861 -6.248,54.407 -6.248,52.934 -6.248,51.085 -5.19,50.027 -4.933,49.77 -3.237,49.77 -0.144,49.77 1.196,48.429 4.642,44.983 21.209,44.983 25.58,44.983 27.331,46.734 27.788,47.191 27.788,52.984 27.788,53.238 28.854,54.305 28.857,54.308 31.357,54.308 35.359,54.308 36.373,55.321 36.881,55.829 36.881,62.459 36.881,63.779 36.373,64.287
GND on Top Layer "Top Layer-No Net" (solid, remove dead copper, pour order 7): -22.102,-15.332 -21.564,-14.794 23.118,-15.332 23.118,0.626 43.816,0.626 48.452,0.626 48.452,5.338 79.637,5.338 81.341,78.56 68.428,91.474 66.275,93.626 -23.985,93.626 -23.985,-12.507 -21.295,-15.198
VO+ on Bottom Layer "Mechanical 1-No Net" (solid, remove dead copper, pour order 1001): 16.459,84.988 21.234,84.988 22.301,83.922 22.885,83.337 22.885,80.67 22.885,79.832 23.419,79.299 25.502,77.216 27.534,77.216 28.626,77.216 32.258,73.584 35.738,70.104 35.738,68.834 35.738,64.745 35.789,64.694 35.611,64.516 31.572,64.516 26.473,64.516 26.187,64.23 22.892,60.935 16.942,60.935 16.608,60.935 16.024,61.519 15.748,61.794 15.748,62.84 15.748,84.277 16.459,84.988
GND on Bottom Layer "Top Layer-No Net" (solid, remove dead copper, pour order 8): -19.522,-15.257 -18.984,-14.719 25.698,-15.257 25.698,0.7 46.395,0.7 53.05,0.7 53.05,5.413 82.216,5.413 83.921,78.635 71.007,91.548 68.855,93.701 -21.406,93.701 -21.406,-12.433 -18.715,-15.123

## Keep-outs
Keep-Out Layer:
  circle w0.254: c57.866,89.458 r6
  circle w0.254: c-17.17,89.408 r6
  circle w0.254: c-17.12,-5.817 r6
  circle w0.254: c45.569,81.467 r2.2
  circle w0.254: c11.254,48.108 r2.2
  circle w0.254: c43.512,26.187 r2.2
  lines w0.127: -19.479,-8.057 60.223,-8.057 60.223,91.664 -19.479,91.664 -19.479,-8.057

## Other copper
Top Layer:
  rectangle net VDD12V1: 18.796,57.048 20.422,58.725
  rectangle net VO+: 16.84,82.525 22.2,83.566
  rectangle net VO+: 18.948,81.407 20.295,84.709
  rectangle net VO+: 16.764,66.04 22.428,67.31
  rectangle net VO+: 18.898,64.516 20.295,69.037
  rectangle net VO+: 33.045,64.694 35.789,67.615
  rectangle net NetJ3_1: -1.397,57.543 5.514,61.824
  rectangle net GND: 14.03,19.091 17.25,32.903
  rectangle net GND: 9.532,25.238 22.12,27.128
  rectangle net NetC32_2: 52.545,-7.417 59.69,9.839
  rectangle net GND: -17.069,45.06 -10.414,46.279
  rectangle net GND: -15.062,35.433 -13.462,47.244
  rectangle net GND: -17.094,41.072 -11.303,42.367
  rectangle net GND: -16.84,37.135 -11.328,38.252
  rectangle net GND: 28.626,83.007 30.886,86.055
  rectangle net VDD12V1: 30.15,54.127 34.036,56.896
  region net NetD6_2: 13.868,64.77 15.011,65.913 15.011,84.176 16.459,85.623 20.828,85.623 23.114,83.337 23.114,80.264 25.73,77.648 27.305,77.648 27.711,78.054 27.711,89.916 26.441,91.186 10.109,91.186 7.01,88.087 7.01,66.827 9.068,64.77
  region net NetJ3_1: 5.461,64.325 5.461,61.189 4.978,60.706 -0.432,59.665 -12.573,59.665 -14.808,62.671 -14.808,73.431 -4.156,73.431 0.661,64.891
  region net NetJ3_4: -6.934,89.154 -4.28,82.953 5.372,80.25 5.444,74.474 4.778,74.143 -13.607,74.143 -13.607,87.028 -11.506,89.129
  region net VDD12V1: 36.881,55.729 35.128,53.975 30.683,53.975 27.788,51.079 27.788,49.341 25.208,49.341 24.79,49.759 26.057,51.025 26.057,57.455 35.255,57.455 36.881,55.829
  region net VDD12V1: -1.981,58.734 -1.981,49.708 -9.103,49.708 -11.125,47.685 -16.332,47.685 -16.332,58.734
  region net NetD6_2: 25.705,82.737 28.118,82.737 28.245,82.61 30.404,82.61 30.658,82.356 30.658,80.832 30.15,80.324 26.086,80.324 25.705,80.705
  pour cut-out: 12.624,49.86 12.344,50.14 10.287,50.14 9.195,49.047 9.195,47.117 10.135,46.177 12.395,46.177 13.36,47.142 13.36,49.022 12.243,50.14
  region net VDD12V1: 31.369,63.043 26.695,58.369 26.695,58.293 35.382,58.293 36.855,59.766 36.855,63.805 36.373,64.287 31.75,64.287 31.344,63.881 31.344,63.043 31.369,63.017
  pour cut-out: 59.893,11.557 59.893,10.236 52.019,10.236 52.019,11.557
Bottom Layer:
  rectangle net VO+: 16.866,66.015 22.504,67.183
  rectangle net VO+: 18.694,64.567 20.447,69.088
  rectangle net VO+: 16.662,82.423 22.149,83.668
  rectangle net VO+: 18.72,80.975 20.269,84.76
  rectangle net NetJ3_1: -1.295,57.76 5.436,61.925
  rectangle net GND: -14.681,35.789 -13.513,46.304
  rectangle net GND: -17.221,45.187 -11.074,46.253
  rectangle net GND: -16.942,41.072 -11.354,42.139
  rectangle net GND: -17.069,37.109 -11.024,38.176
  region net NetD6_2: 13.868,64.77 15.011,65.913 15.011,84.176 16.459,85.623 20.828,85.623 23.114,83.337 23.114,80.264 25.73,77.648 27.305,77.648 27.711,78.054 27.711,89.916 27.686,89.941 9.195,89.941 9.195,64.77
  region net NetJ3_1: 5.461,64.325 5.461,61.189 4.978,60.706 -0.432,59.665 -12.573,59.665 -14.808,62.671 -14.808,73.431 -4.156,73.431 0.661,64.891
  region net VDD12V1: -1.981,58.734 -1.981,51.206 -7.731,51.206 -11.252,47.685 -16.332,47.685 -16.332,58.734
  region net NetD6_2: 25.705,82.737 28.118,82.737 28.245,82.61 30.404,82.61 30.658,82.356 30.658,80.832 30.15,80.324 26.086,80.324 25.705,80.705
  region net NetJ3_4: -6.985,89.154 -3.518,81.308 5.44,78.8 5.497,74.27 -13.106,74.27 -13.106,86.919 -10.916,89.109

## Silkscreen, mask and mechanical layers (free items; w line width, h text height)
Top Overlay:
  lines w0.127: 34.392,79.35 34.925,79.35 35.763,78.511
  text "+" at -4.178,83.227 h1.02
  text "+" at -3.824,79.319 h1.02
  text "+" at -3.988,75.318 h1.02
  text "-" at -4.293,71.818 h1.02
  text "-" at -4.293,67.929 h1.02
  text "-" at -4.293,64.155 h1.02
  text "12V" at -8.302,56.485 h1.02
  text "12V" at -8.302,52.787 h1.02
  text "12V" at -8.331,49.138 h1.02
  text "GND" at -8.718,44.949 h1.02
  text "GND" at -8.687,39.014 h1.02
  text "GND" at -8.636,36.144 h1.02
  text "B" at 8.255,-0.483 h1.27
  text "A" at 11.557,-0.559 h1.27
Bottom Overlay:
  circle w0.254: c17.094,48.082 r2.2
  circle w0.254: c50.673,81.432 r2.2
  rectangle: 1.194,1.6 37.592,34.232
  rectangle: 36.043,44.856 52.705,77.488
  rectangle: 0.457,0.533 52.68,45.415
  lines w0.127: 52.984,87 35,87 35,51.079 0,51.079 0,0 53,0 53,87
  text "GND" at -10.693,3.353 h1.02 r90
  text "TXD" at -8.407,3.353 h1.02 r90
  text "RXD" at -5.893,3.2 h1.02 r90
  text "485_B" at 6.325,-1.194 h1.02 r90
  text "485_A" at 14.961,-1.626 h1.02 r90
  text "ELE MODULE V1.3  20211029" at 50.546,-4.496 h2.03
Bottom Solder:
  region: 17.45,73.736 31.572,73.736 34.265,71.044 34.265,68.021 28.651,68.021 21.615,60.985 17.018,60.985 15.824,62.179 15.824,72.111
  region: 13.868,64.77 15.011,65.913 15.011,84.176 16.459,85.623 20.828,85.623 23.114,83.337 23.114,80.264 25.73,77.648 27.305,77.648 27.711,78.054 27.711,89.916 27.686,89.941 9.195,89.941 9.195,64.77
  region: -6.985,89.154 -4.089,82.601 5.426,79.936 5.497,74.27 -13.106,74.27 -13.106,86.919 -10.916,89.109
  region: 5.461,64.325 5.461,61.189 -2.456,59.665 -12.573,59.665 -14.808,62.671 -14.808,73.431 -4.156,73.431 0.661,64.891
Mechanical 1:
  circle w0.254: c45.595,81.467 r2.2
  circle w0.254: c11.254,48.108 r2.2
  circle w0.254: c43.512,26.187 r2.2
  lines w0.127: -19.634,-8.195 -19.634,91.805 60.366,91.805 60.366,-8.195 -19.634,-8.195

## Text inside footprints (layer, text, board x,y; h text height)
C1: Top Overlay "+" at 31.217,54.712 h1.52 r90
C2: Top Overlay "+" at -14.087,12.829 h1.27